# Altium PCB S52最小系统.PcbDoc (part 1 of 9)
Units mm, origin at the board's own origin, x right, y up, seen from the top; angles counter-clockwise.
Board outline 152.4 x 101.6 mm, 2 copper layers (Top Layer, Bottom Layer); 29 components, 53 nets, 176 pads, 2 vias.
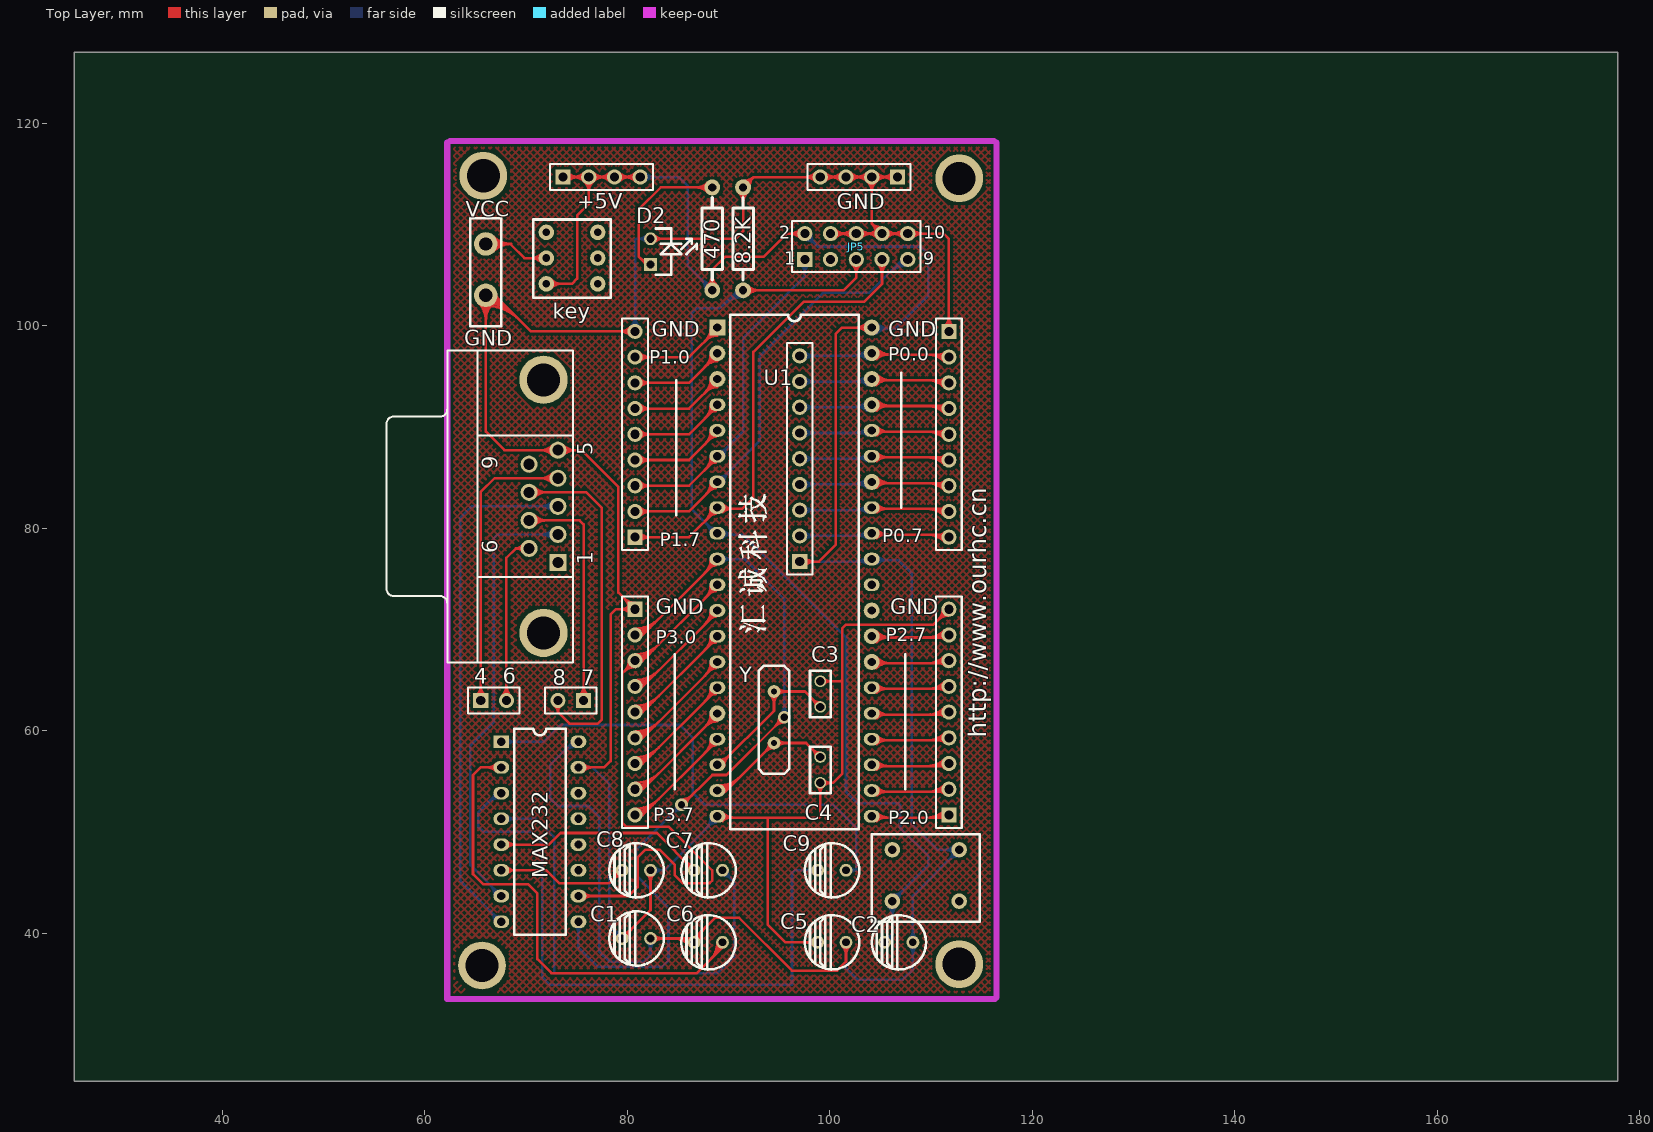
[diagram p0: Top Layer view]
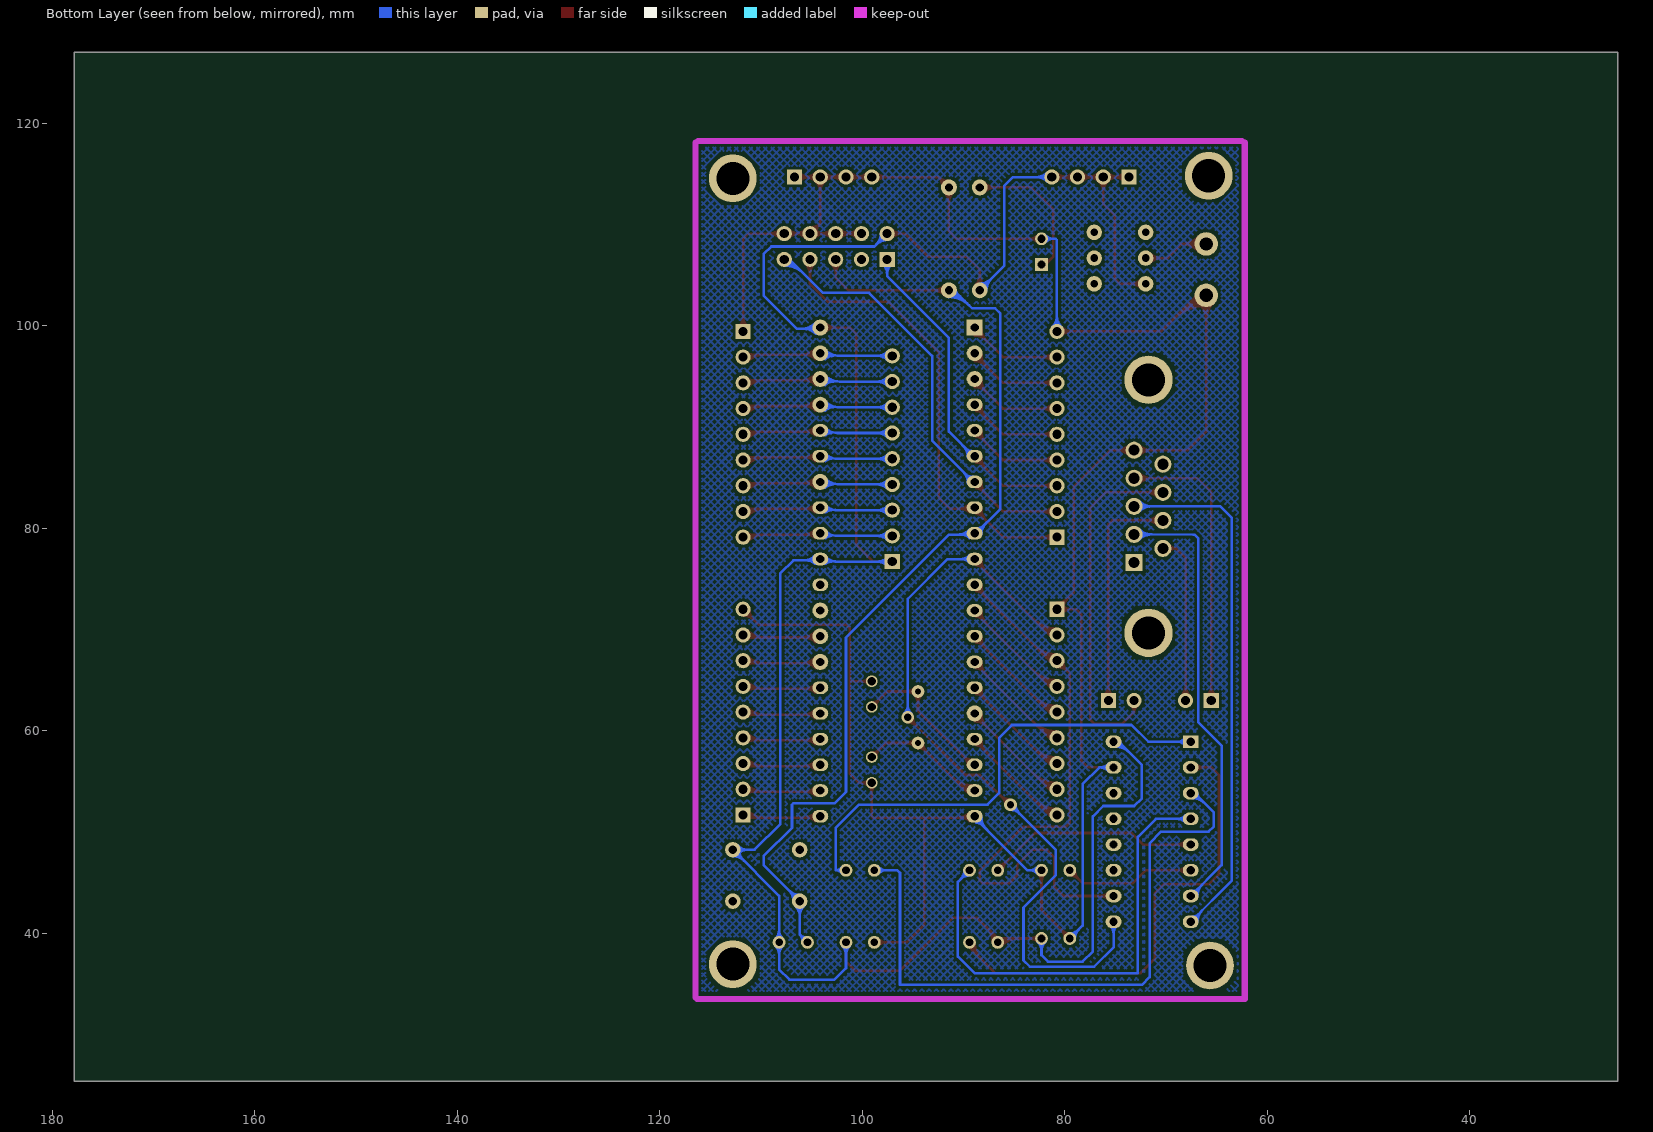
[diagram p1: Bottom Layer view, seen from below]

## Layer stack, top to bottom
Top Layer: signal copper 0.0356
Dielectric: dielectric 0.32, FR-4, Dk 4.8
Bottom Layer: signal copper 0.0356

## Board outline
25.4,25.4 177.8,25.4 177.8,127 25.4,127

## Design rules (kind name [scope] priority, off if disabled: settings)
Clearance [All] p1: gap=0.254
ComponentClearance [All] p1: gap=0.254 collisioncheckmode=0 verticalgap=0.254
PolygonConnect [All] p1: connectstyle=Relief reliefconductorwidth=0.254 reliefentries=4 polygonreliefangle="90 Angle"
RoutingVias [All] p1: holewidth=0.711 width=1.27 viastyle="Through Hole" minholewidth=0.711 minwidth=1.27 maxholewidth=0.711 maxwidth=1.27
SolderMaskExpansion [All] p1: expansion=0.102
TestPointUsage [All] p1: valid=0 allowmultiple=FALSE
Testpoint [All] p1: side=15 testpointundercomponent=TRUE minsize=1.016 maxsize=2.54 preferedsize=1.524 minholesize=0 maxholesize=1.016 preferedholesize=0.813 testpointgrid=0.025 style=1023 order=0123456789
Width [All] p1: maxlimit=0.254 minlimit=0.254 preferedwidth=0.254
17 further rules are at their usual default settings.

## Components (designator, comment, footprint, x,y, rotation, side; value= is the part's Value field where it differs from the comment)
8.2K "8.2k" AXIAL0.4 91.44,103.505 r90 top (schematic designator R23)
11 "power" power1 70.104,101.473 r90 top
470 "4.7k" AXIAL0.4 88.392,103.505 r90 top (schematic designator R2)
+5V "" HDR1X4 73.66,114.681 r0 top (schematic designator JP7)
C1 "360u\15v" cap2 86.868,39.497 r180 top
C2 "10uf" cap2 112.776,39.116 r180 top
C3 "15p" RAD0.3 99.06,61.849 r90 top
C4 "15p" RAD0.3 99.06,57.912 r270 top
C5 "1uf" cap2 106.172,39.116 r180 top
C6 "1uf" cap2 93.98,39.116 r180 top
C7 "1uf" cap2 93.98,46.228 r180 top
C8 "1uf" cap2 86.868,46.228 r180 top
C9 "1uf" cap2 106.172,46.228 r180 top
D2 "LED" LED 82.804,108.077 r270 top
GND "" HDR1X4 106.68,114.681 r180 top (schematic designator JP6)
J61 "D Connector 9" DSUB1.385-2H9 62.23,82.169 r90 top
JP1 "" HDR1X9 111.76,99.441 r270 top
JP2 "" HDR1X9 80.772,79.121 r90 top
JP3 "" HDR1X9 111.76,51.689 r90 top
JP4 "" HDR1X9 80.772,72.009 r270 top
JP5 "download" HDR2X5 97.536,106.553 r0 top
JP9 "" HDR1X2 75.692,62.992 r180 top
JP10 "Header 3" HDR1X2 65.532,62.992 r0 top
key "KEY" KEY-1 106.172,48.26 r0 top
key "Comment" key 77.724,106.68 r0 top
U1 "89c51" DIP40 88.9,100.076 r0 top
U4 "MAX232" DIP16 67.564,58.928 r0 top
Y "12M" CRYSTAL 93.472,61.341 r90 top
? "Comment" HDR1X9 97.028,76.708 r90 top

## Footprints (in the part's own frame and the unit in brackets; to place one, negate y for a bottom-side part, rotate by r counter-clockwise, add the part's x,y. Pads: shape width x height; smd on the part's side, far side on the other; paste and mask are expansions set on the pad)
AXIAL0.4 [mil]
  round 62 hole 32: 1(-0.15,-0.04) 2(399.85,-0.04)
  silkscreen extent 40,-40 360,40
cap2 [mil]
  round 50 hole 30: 1(180,0) 2(290,0)
  silkscreen extent 129,-106 340,106
CRYSTAL [mil]
  round 50 hole 25: 1(-100,-40) 2(100,-40)
  silkscreen extent -220,-100 200,20
DIP16 [mil]
  rect 62x49.21 hole 32: 1(-0.15,-0.04)
  oval 62x49.21 hole 32: 2(-0.15,-100.04) 3(-0.15,-200.04) 4(-0.15,-300.04) 5(-0.15,-400.04) 6(-0.15,-500.04) 7(-0.15,-600.04) 8(-0.15,-700.04) 9(299.85,-700.04) 10(299.85,-600.04) 11(299.85,-500.04) 12(299.85,-400.04) 13(299.85,-300.04) 14(299.85,-200.04) 15(299.85,-100.04) 16(299.85,-0.04)
  silkscreen extent 50,-750 250,50
DIP40 [mil]
  rect 62x62 hole 32: 1(-0.15,-10.04)
  round 62 hole 32: 2(-0.15,-110.04) 3(-0.15,-210.04) 16(-0.15,-1510.04) 27(599.85,-1310.04) 28(599.85,-1210.04) 29(599.85,-1110.04) 34(599.85,-610.04) 37(599.85,-310.04) 38(599.85,-210.04) 39(599.85,-110.04) 40(599.85,-10.04)
  oval 62x49.21 hole 32: 4(-0.15,-310.04) 5(-0.15,-410.04) 6(-0.15,-510.04) 7(-0.15,-610.04) 8(-0.15,-710.04) 9(-0.15,-810.04) 10(-0.15,-910.04) 11(-0.15,-1010.04) 12(-0.15,-1110.04) 13(-0.15,-1210.04) 14(-0.15,-1310.04) 15(-0.15,-1410.04) 17(-0.15,-1610.04) 18(-0.15,-1710.04) 19(-0.15,-1810.04) 20(-0.15,-1910.04) 21(599.85,-1910.04) 22(599.85,-1810.04) 23(599.85,-1710.04) 24(599.85,-1610.04) 25(599.85,-1510.04) 26(599.85,-1410.04) 30(599.85,-1010.04) 31(599.85,-910.04) 32(599.85,-810.04) 33(599.85,-710.04) 35(599.85,-510.04) 36(599.85,-410.04)
  silkscreen extent 50,-1960 550,40
DSUB1.385-2H9 [mm] "Connector; D Subminiature; 9 Position; Right Angle; Pitch 1.385 mm"
  rect 1.69x1.69 hole 1.09: 1(-5.54,-10.92)
  round 1.69 hole 1.09: 2(-2.77,-10.92) 3(0,-10.92) 4(2.77,-10.92) 5(5.54,-10.92) 6(-4.155,-8.08) 7(-1.385,-8.08) 8(1.385,-8.08) 9(4.155,-8.08)
  round 4.76 hole 3.26: 10(-12.495,-9.5) 11(12.495,-9.5)
  silkscreen extent -15.4,-12.4 15.4,6
HDR1X2 [mm] "Connector; Header; 2 Position"
  rect 1.5x1.5 hole 0.9: 1(0,0)
  round 1.5 hole 0.9: 2(2.54,0)
  silkscreen extent -1.27,-1.27 3.81,1.27
HDR1X4 [mm] "Connector; Header; 4 Position"
  rect 1.5x1.5 hole 0.9: 1(0,0)
  round 1.5 hole 0.9: 2(2.54,0) 3(5.08,0) 4(7.62,0)
  silkscreen extent -1.27,-1.27 8.89,1.27
HDR1X9 [mm] "Connector; Header; 9 Position"
  rect 1.5x1.5 hole 0.9: 1(0,0)
  round 1.5 hole 0.9: 2(2.54,0) 3(5.08,0) 4(7.62,0) 5(10.16,0) 6(12.7,0) 7(15.24,0) 8(17.78,0) 9(20.32,0)
  silkscreen extent -1.27,-1.27 21.59,1.27
HDR2X5 [mm] "Connector; Header; 5x2 Position"
  rect 1.5x1.5 hole 0.9: 1(0,0)
  round 1.5 hole 0.9: 2(0,2.54) 3(2.54,0) 4(2.54,2.54) 5(5.08,0) 6(5.08,2.54) 7(7.62,0) 8(7.62,2.54) 9(10.16,0) 10(10.16,2.54)
  silkscreen extent -1.27,-1.27 11.43,3.81
key [mil]
  round 60 hole 30: 0(-225,100) 1(-225,0) 2(-225,-100) 3(-25,-100) 4(-25,0) 5(-25,100)
  silkscreen extent -275,-155 25,150
KEY-1 [mil] "KEY"
  round 60 hole 32: 0(0,0) 1(260,0) 2(0,-200) 3(260,-200)
  silkscreen extent -80,-280 340,60
LED [mil]
  rect 50x50 hole 32: 1(80,-20)
  round 50 hole 32: 2(-20,-20)
  silkscreen extent -60,0 120,160
power1 [mm] "power"
  round 2.32 hole 1.32: 1(6.604,4.064) 2(1.524,4.064)
  silkscreen extent -1.52,2.54 9.14,5.59
RAD0.3 [mil]
  round 45 hole 32: 1(20,0) 2(120,0)
  silkscreen extent -20,-40 160,40

## Part data
8.2K 470: library part RES2
+5V GND: library part "Header 4", "Header, 4-Pin"
C1 C2 C5 C6 C7 C8 C9: library part "CAPACITOR POL", "Capacitor"
C3 C4: library part CAP, "Capacitor"
J61: "Receptacle Assembly, 9 Position, Right Angle"
JP1 JP2 JP3 JP4: library part "Header 9", "Header, 9-Pin"
JP5: library part "Header 5X2", "Header, 5-Pin, Dual row"
JP9 JP10: library part "Header 2", "Header, 2-Pin"
U1: library part 8051
Y: library part CRYSTAL, "Crystal"
?: library part "Header 9"

## Free pads (board coordinates)
  round 4.72 hole 3.267: 0(65.786,114.808) 1(112.776,114.554) 2(112.776,36.957) 3(65.659,36.83)

## Via types
v1: diameter 1.27, hole 0.711, Top Layer to Bottom Layer, 2 vias

## Nets (pads, with @x,y where several pads share a name; then routed paths per layer and width w, separated by ;. In a path a pad name is that pad's centre, name@x,y a point inside that pad or via, vN(x,y) a via of type N, cw(c..) or ccw(c..) an arc to the next point about the centre after c; other vN are vias at no path point)
4: J61.4 JP10.1 | length 111.2
  Top Layer w0.254: JP10.1@65.532,62.992 65.532,83.566 66.905,84.939 J61.4@73.15,84.939 ; JP10.1@65.091,63.433 ccw(c64.028,64.496) 65.532,64.496 ; JP10.1@65.091,63.433 ccw(c64.028,64.496) 65.532,64.496 ; JP10.1@65.091,63.433 ccw(c64.028,64.496) 65.532,64.496 ; JP10.1@65.091,63.433 ccw(c64.028,64.496) 65.532,64.496 ; JP10.1@65.091,63.433 ccw(c64.028,64.496) 65.532,64.496 ; JP10.1@65.091,63.433 ccw(c64.028,64.496) 65.532,64.496 ; JP10.1@65.091,63.433 ccw(c64.028,64.496) 65.532,64.496 ; JP10.1@65.091,63.433 ccw(c64.028,64.496) 65.532,64.496 ; JP10.1@65.091,63.433 ccw(c64.028,64.496) 65.532,64.496 ; JP10.1@65.091,63.433 ccw(c64.028,64.496) 65.532,64.496 ; JP10.1@65.271,63.253 ccw(c64.641,63.883) 65.532,63.883 ; JP10.1@65.271,63.253 ccw(c64.641,63.883) 65.532,63.883 ; JP10.1@65.271,63.253 ccw(c64.641,63.883) 65.532,63.883 ; JP10.1@65.271,63.253 ccw(c64.641,63.883) 65.532,63.883 ; JP10.1@65.271,63.253 ccw(c64.641,63.883) 65.532,63.883 ; JP10.1@65.271,63.253 ccw(c64.641,63.883) 65.532,63.883 ; JP10.1@65.271,63.253 ccw(c64.641,63.883) 65.532,63.883 ; JP10.1@65.271,63.253 ccw(c64.641,63.883) 65.532,63.883 ; JP10.1@65.271,63.253 ccw(c64.641,63.883) 65.532,63.883 ; JP10.1@65.271,63.253 ccw(c64.641,63.883) 65.532,63.883 ; 65.532,63.883 ccw(c66.423,63.883) JP10.1@65.793,63.253 ; 65.532,63.883 ccw(c66.423,63.883) JP10.1@65.793,63.253 ; 65.532,63.883 ccw(c66.423,63.883) JP10.1@65.793,63.253 ; 65.532,63.883 ccw(c66.423,63.883) JP10.1@65.793,63.253 ; 65.532,63.883 ccw(c66.423,63.883) JP10.1@65.793,63.253 ; 65.532,63.883 ccw(c66.423,63.883) JP10.1@65.793,63.253 ; 65.532,63.883 ccw(c66.423,63.883) JP10.1@65.793,63.253 ; 65.532,63.883 ccw(c66.423,63.883) JP10.1@65.793,63.253 ; 65.532,63.883 ccw(c66.423,63.883) JP10.1@65.793,63.253 ; 65.532,63.883 ccw(c66.423,63.883) JP10.1@65.793,63.253 ; 65.532,64.496 ccw(c67.036,64.496) JP10.1@65.973,63.433 ; 65.532,64.496 ccw(c67.036,64.496) JP10.1@65.973,63.433 ; 65.532,64.496 ccw(c67.036,64.496) JP10.1@65.973,63.433 ; 65.532,64.496 ccw(c67.036,64.496) JP10.1@65.973,63.433 ; 65.532,64.496 ccw(c67.036,64.496) JP10.1@65.973,63.433 ; 65.532,64.496 ccw(c67.036,64.496) JP10.1@65.973,63.433 ; 65.532,64.496 ccw(c67.036,64.496) JP10.1@65.973,63.433 ; 65.532,64.496 ccw(c67.036,64.496) JP10.1@65.973,63.433 ; 65.532,64.496 ccw(c67.036,64.496) JP10.1@65.973,63.433 ; 65.532,64.496 ccw(c67.036,64.496) JP10.1@65.973,63.433 ; 71.417,84.939 cw(c71.417,83.206) J61.4@72.642,84.431 ; 71.417,84.939 ccw(c71.417,86.672) J61.4@72.642,85.447 ; 71.417,84.939 cw(c71.417,83.206) J61.4@72.642,84.431 ; 71.417,84.939 ccw(c71.417,86.672) J61.4@72.642,85.447 ; 71.417,84.939 cw(c71.417,83.206) J61.4@72.642,84.431 ; 71.417,84.939 ccw(c71.417,86.672) J61.4@72.642,85.447 ; 71.417,84.939 ccw(c71.417,86.672) J61.4@72.642,85.447 ; 71.417,84.939 cw(c71.417,83.206) J61.4@72.642,84.431 ; 71.417,84.939 ccw(c71.417,86.672) J61.4@72.642,85.447 ; 71.417,84.939 cw(c71.417,83.206) J61.4@72.642,84.431 ; 71.417,84.939 ccw(c71.417,86.672) J61.4@72.642,85.447 ; 71.417,84.939 cw(c71.417,83.206) J61.4@72.642,84.431 ; 71.417,84.939 ccw(c71.417,86.672) J61.4@72.642,85.447 ; 71.417,84.939 cw(c71.417,83.206) J61.4@72.642,84.431 ; 71.417,84.939 ccw(c71.417,86.672) J61.4@72.642,85.447 ; 71.417,84.939 cw(c71.417,83.206) J61.4@72.642,84.431 ; 71.417,84.939 ccw(c71.417,86.672) J61.4@72.642,85.447 ; 71.417,84.939 cw(c71.417,83.206) J61.4@72.642,84.431 ; 71.417,84.939 ccw(c71.417,86.672) J61.4@72.642,85.447 ; 71.417,84.939 cw(c71.417,83.206) J61.4@72.642,84.431 ; 72.03,84.939 cw(c72.03,83.819) J61.4@72.822,84.611 ; 72.03,84.939 ccw(c72.03,86.059) J61.4@72.822,85.267 ; 72.03,84.939 cw(c72.03,83.819) J61.4@72.822,84.611 ; 72.03,84.939 ccw(c72.03,86.059) J61.4@72.822,85.267 ; 72.03,84.939 cw(c72.03,83.819) J61.4@72.822,84.611 ; 72.03,84.939 ccw(c72.03,86.059) J61.4@72.822,85.267 ; 72.03,84.939 ccw(c72.03,86.059) J61.4@72.822,85.267 ; 72.03,84.939 cw(c72.03,83.819) J61.4@72.822,84.611 ; 72.03,84.939 ccw(c72.03,86.059) J61.4@72.822,85.267 ; 72.03,84.939 cw(c72.03,83.819) J61.4@72.822,84.611 ; 72.03,84.939 ccw(c72.03,86.059) J61.4@72.822,85.267 ; 72.03,84.939 cw(c72.03,83.819) J61.4@72.822,84.611 ; 72.03,84.939 ccw(c72.03,86.059) J61.4@72.822,85.267 ; 72.03,84.939 cw(c72.03,83.819) J61.4@72.822,84.611 ; 72.03,84.939 ccw(c72.03,86.059) J61.4@72.822,85.267 ; 72.03,84.939 cw(c72.03,83.819) J61.4@72.822,84.611 ; 72.03,84.939 ccw(c72.03,86.059) J61.4@72.822,85.267 ; 72.03,84.939 cw(c72.03,83.819) J61.4@72.822,84.611 ; 72.03,84.939 ccw(c72.03,86.059) J61.4@72.822,85.267 ; 72.03,84.939 cw(c72.03,83.819) J61.4@72.822,84.611
6: J61.6 JP10.2 | length 82.1
  Top Layer w0.254: JP10.2@68.072,62.992 68.072,77.089 68.997,78.014 ; J61.6@70.31,78.014 68.997,78.014 ; JP10.2@67.631,63.433 ccw(c66.568,64.496) 68.072,64.496 ; JP10.2@67.631,63.433 ccw(c66.568,64.496) 68.072,64.496 ; JP10.2@67.631,63.433 ccw(c66.568,64.496) 68.072,64.496 ; JP10.2@67.631,63.433 ccw(c66.568,64.496) 68.072,64.496 ; JP10.2@67.631,63.433 ccw(c66.568,64.496) 68.072,64.496 ; JP10.2@67.631,63.433 ccw(c66.568,64.496) 68.072,64.496 ; JP10.2@67.631,63.433 ccw(c66.568,64.496) 68.072,64.496 ; JP10.2@67.631,63.433 ccw(c66.568,64.496) 68.072,64.496 ; JP10.2@67.631,63.433 ccw(c66.568,64.496) 68.072,64.496 ; JP10.2@67.631,63.433 ccw(c66.568,64.496) 68.072,64.496 ; JP10.2@67.811,63.253 ccw(c67.181,63.883) 68.072,63.883 ; JP10.2@67.811,63.253 ccw(c67.181,63.883) 68.072,63.883 ; JP10.2@67.811,63.253 ccw(c67.181,63.883) 68.072,63.883 ; JP10.2@67.811,63.253 ccw(c67.181,63.883) 68.072,63.883 ; JP10.2@67.811,63.253 ccw(c67.181,63.883) 68.072,63.883 ; JP10.2@67.811,63.253 ccw(c67.181,63.883) 68.072,63.883 ; JP10.2@67.811,63.253 ccw(c67.181,63.883) 68.072,63.883 ; JP10.2@67.811,63.253 ccw(c67.181,63.883) 68.072,63.883 ; JP10.2@67.811,63.253 ccw(c67.181,63.883) 68.072,63.883 ; JP10.2@67.811,63.253 ccw(c67.181,63.883) 68.072,63.883 ; 68.072,63.883 ccw(c68.963,63.883) JP10.2@68.333,63.253 ; 68.072,63.883 ccw(c68.963,63.883) JP10.2@68.333,63.253 ; 68.072,63.883 ccw(c68.963,63.883) JP10.2@68.333,63.253 ; 68.072,63.883 ccw(c68.963,63.883) JP10.2@68.333,63.253 ; 68.072,63.883 ccw(c68.963,63.883) JP10.2@68.333,63.253 ; 68.072,63.883 ccw(c68.963,63.883) JP10.2@68.333,63.253 ; 68.072,63.883 ccw(c68.963,63.883) JP10.2@68.333,63.253 ; 68.072,63.883 ccw(c68.963,63.883) JP10.2@68.333,63.253 ; 68.072,63.883 ccw(c68.963,63.883) JP10.2@68.333,63.253 ; 68.072,63.883 ccw(c68.963,63.883) JP10.2@68.333,63.253 ; 68.072,64.496 ccw(c69.576,64.496) JP10.2@68.513,63.433 ; 68.072,64.496 ccw(c69.576,64.496) JP10.2@68.513,63.433 ; 68.072,64.496 ccw(c69.576,64.496) JP10.2@68.513,63.433 ; 68.072,64.496 ccw(c69.576,64.496) JP10.2@68.513,63.433 ; 68.072,64.496 ccw(c69.576,64.496) JP10.2@68.513,63.433 ; 68.072,64.496 ccw(c69.576,64.496) JP10.2@68.513,63.433 ; 68.072,64.496 ccw(c69.576,64.496) JP10.2@68.513,63.433 ; 68.072,64.496 ccw(c69.576,64.496) JP10.2@68.513,63.433 ; 68.072,64.496 ccw(c69.576,64.496) JP10.2@68.513,63.433 ; 68.072,64.496 ccw(c69.576,64.496) JP10.2@68.513,63.433 ; 68.997,78.014 cw(c68.997,77.173) J61.6@69.705,77.627 ; 68.997,78.014 ccw(c68.997,78.855) J61.6@69.705,78.401 ; 68.997,78.014 cw(c68.997,77.173) J61.6@69.705,77.627 ; 68.997,78.014 ccw(c68.997,78.855) J61.6@69.705,78.401 ; 68.997,78.014 cw(c68.997,77.173) J61.6@69.705,77.627 ; 68.997,78.014 ccw(c68.997,78.855) J61.6@69.705,78.401 ; 68.997,78.014 ccw(c68.997,78.855) J61.6@69.705,78.401 ; 68.997,78.014 cw(c68.997,77.173) J61.6@69.705,77.627 ; 68.997,78.014 ccw(c68.997,78.855) J61.6@69.705,78.401 ; 68.997,78.014 cw(c68.997,77.173) J61.6@69.705,77.627 ; 68.997,78.014 ccw(c68.997,78.855) J61.6@69.705,78.401 ; 68.997,78.014 cw(c68.997,77.173) J61.6@69.705,77.627 ; 68.997,78.014 ccw(c68.997,78.855) J61.6@69.705,78.401 ; 68.997,78.014 cw(c68.997,77.173) J61.6@69.705,77.627 ; 68.997,78.014 ccw(c68.997,78.855) J61.6@69.705,78.401 ; 68.997,78.014 cw(c68.997,77.173) J61.6@69.705,77.627 ; 68.997,78.014 ccw(c68.997,78.855) J61.6@69.705,78.401 ; 68.997,78.014 cw(c68.997,77.173) J61.6@69.705,77.627 ; 68.997,78.014 ccw(c68.997,78.855) J61.6@69.705,78.401 ; 68.997,78.014 cw(c68.997,77.173) J61.6@69.705,77.627 ; 69.462,78.014 cw(c69.462,77.47) J61.6@69.919,77.764 ; 69.462,78.014 ccw(c69.462,78.558) J61.6@69.919,78.264 ; 69.462,78.014 cw(c69.462,77.47) J61.6@69.919,77.764 ; 69.462,78.014 ccw(c69.462,78.558) J61.6@69.919,78.264 ; 69.462,78.014 cw(c69.462,77.47) J61.6@69.919,77.764 ; 69.462,78.014 ccw(c69.462,78.558) J61.6@69.919,78.264 ; 69.462,78.014 ccw(c69.462,78.558) J61.6@69.919,78.264 ; 69.462,78.014 cw(c69.462,77.47) J61.6@69.919,77.764 ; 69.462,78.014 ccw(c69.462,78.558) J61.6@69.919,78.264 ; 69.462,78.014 cw(c69.462,77.47) J61.6@69.919,77.764 ; 69.462,78.014 ccw(c69.462,78.558) J61.6@69.919,78.264 ; 69.462,78.014 cw(c69.462,77.47) J61.6@69.919,77.764 ; 69.462,78.014 ccw(c69.462,78.558) J61.6@69.919,78.264 ; 69.462,78.014 cw(c69.462,77.47) J61.6@69.919,77.764 ; 69.462,78.014 ccw(c69.462,78.558) J61.6@69.919,78.264 ; 69.462,78.014 cw(c69.462,77.47) J61.6@69.919,77.764 ; 69.462,78.014 ccw(c69.462,78.558) J61.6@69.919,78.264 ; 69.462,78.014 cw(c69.462,77.47) J61.6@69.919,77.764 ; 69.462,78.014 ccw(c69.462,78.558) J61.6@69.919,78.264 ; 69.462,78.014 cw(c69.462,77.47) J61.6@69.919,77.764
7: J61.7 JP9.1 | length 105.4
  Top Layer w0.254: J61.7@70.31,80.784 75.299,80.784 75.692,80.391 JP9.1@75.692,62.992 ; J61.7@70.638,80.456 cw(c71.43,79.664) 71.43,80.784 ; J61.7@70.638,80.456 cw(c71.43,79.664) 71.43,80.784 ; J61.7@70.638,80.456 cw(c71.43,79.664) 71.43,80.784 ; J61.7@70.638,80.456 cw(c71.43,79.664) 71.43,80.784 ; J61.7@70.638,80.456 cw(c71.43,79.664) 71.43,80.784 ; J61.7@70.638,80.456 cw(c71.43,79.664) 71.43,80.784 ; J61.7@70.638,80.456 cw(c71.43,79.664) 71.43,80.784 ; J61.7@70.638,80.456 cw(c71.43,79.664) 71.43,80.784 ; J61.7@70.638,80.456 cw(c71.43,79.664) 71.43,80.784 ; J61.7@70.638,80.456 cw(c71.43,79.664) 71.43,80.784 ; J61.7@70.638,81.112 ccw(c71.43,81.904) 71.43,80.784 ; J61.7@70.638,81.112 ccw(c71.43,81.904) 71.43,80.784 ; J61.7@70.638,81.112 ccw(c71.43,81.904) 71.43,80.784 ; J61.7@70.638,81.112 ccw(c71.43,81.904) 71.43,80.784 ; J61.7@70.638,81.112 ccw(c71.43,81.904) 71.43,80.784 ; J61.7@70.638,81.112 ccw(c71.43,81.904) 71.43,80.784 ; J61.7@70.638,81.112 ccw(c71.43,81.904) 71.43,80.784 ; J61.7@70.638,81.112 ccw(c71.43,81.904) 71.43,80.784 ; J61.7@70.638,81.112 ccw(c71.43,81.904) 71.43,80.784 ; J61.7@70.638,81.112 ccw(c71.43,81.904) 71.43,80.784 ; J61.7@70.818,80.276 cw(c72.043,79.051) 72.043,80.784 ; J61.7@70.818,80.276 cw(c72.043,79.051) 72.043,80.784 ; J61.7@70.818,80.276 cw(c72.043,79.051) 72.043,80.784 ; J61.7@70.818,80.276 cw(c72.043,79.051) 72.043,80.784 ; J61.7@70.818,80.276 cw(c72.043,79.051) 72.043,80.784 ; J61.7@70.818,80.276 cw(c72.043,79.051) 72.043,80.784 ; J61.7@70.818,80.276 cw(c72.043,79.051) 72.043,80.784 ; J61.7@70.818,80.276 cw(c72.043,79.051) 72.043,80.784 ; J61.7@70.818,80.276 cw(c72.043,79.051) 72.043,80.784 ; J61.7@70.818,80.276 cw(c72.043,79.051) 72.043,80.784 ; J61.7@70.818,81.292 ccw(c72.043,82.517) 72.043,80.784 ; J61.7@70.818,81.292 ccw(c72.043,82.517) 72.043,80.784 ; J61.7@70.818,81.292 ccw(c72.043,82.517) 72.043,80.784 ; J61.7@70.818,81.292 ccw(c72.043,82.517) 72.043,80.784 ; J61.7@70.818,81.292 ccw(c72.043,82.517) 72.043,80.784 ; J61.7@70.818,81.292 ccw(c72.043,82.517) 72.043,80.784 ; J61.7@70.818,81.292 ccw(c72.043,82.517) 72.043,80.784 ; J61.7@70.818,81.292 ccw(c72.043,82.517) 72.043,80.784 ; J61.7@70.818,81.292 ccw(c72.043,82.517) 72.043,80.784 ; J61.7@70.818,81.292 ccw(c72.043,82.517) 72.043,80.784 ; JP9.1@75.251,63.433 ccw(c74.188,64.496) 75.692,64.496 ; JP9.1@75.251,63.433 ccw(c74.188,64.496) 75.692,64.496 ; JP9.1@75.251,63.433 ccw(c74.188,64.496) 75.692,64.496 ; JP9.1@75.251,63.433 ccw(c74.188,64.496) 75.692,64.496 ; JP9.1@75.251,63.433 ccw(c74.188,64.496) 75.692,64.496 ; JP9.1@75.251,63.433 ccw(c74.188,64.496) 75.692,64.496 ; JP9.1@75.251,63.433 ccw(c74.188,64.496) 75.692,64.496 ; JP9.1@75.251,63.433 ccw(c74.188,64.496) 75.692,64.496 ; JP9.1@75.251,63.433 ccw(c74.188,64.496) 75.692,64.496 ; JP9.1@75.251,63.433 ccw(c74.188,64.496) 75.692,64.496 ; JP9.1@75.431,63.253 ccw(c74.801,63.883) 75.692,63.883 ; JP9.1@75.431,63.253 ccw(c74.801,63.883) 75.692,63.883 ; JP9.1@75.431,63.253 ccw(c74.801,63.883) 75.692,63.883 ; JP9.1@75.431,63.253 ccw(c74.801,63.883) 75.692,63.883 ; JP9.1@75.431,63.253 ccw(c74.801,63.883) 75.692,63.883 ; JP9.1@75.431,63.253 ccw(c74.801,63.883) 75.692,63.883 ; JP9.1@75.431,63.253 ccw(c74.801,63.883) 75.692,63.883 ; JP9.1@75.431,63.253 ccw(c74.801,63.883) 75.692,63.883 ; JP9.1@75.431,63.253 ccw(c74.801,63.883) 75.692,63.883 ; JP9.1@75.431,63.253 ccw(c74.801,63.883) 75.692,63.883 ; 75.692,63.883 ccw(c76.583,63.883) JP9.1@75.953,63.253 ; 75.692,63.883 ccw(c76.583,63.883) JP9.1@75.953,63.253 ; 75.692,63.883 ccw(c76.583,63.883) JP9.1@75.953,63.253 ; 75.692,63.883 ccw(c76.583,63.883) JP9.1@75.953,63.253 ; 75.692,63.883 ccw(c76.583,63.883) JP9.1@75.953,63.253 ; 75.692,63.883 ccw(c76.583,63.883) JP9.1@75.953,63.253 ; 75.692,63.883 ccw(c76.583,63.883) JP9.1@75.953,63.253 ; 75.692,63.883 ccw(c76.583,63.883) JP9.1@75.953,63.253 ; 75.692,63.883 ccw(c76.583,63.883) JP9.1@75.953,63.253 ; 75.692,63.883 ccw(c76.583,63.883) JP9.1@75.953,63.253 ; 75.692,64.496 ccw(c77.196,64.496) JP9.1@76.133,63.433 ; 75.692,64.496 ccw(c77.196,64.496) JP9.1@76.133,63.433 ; 75.692,64.496 ccw(c77.196,64.496) JP9.1@76.133,63.433 ; 75.692,64.496 ccw(c77.196,64.496) JP9.1@76.133,63.433 ; 75.692,64.496 ccw(c77.196,64.496) JP9.1@76.133,63.433 ; 75.692,64.496 ccw(c77.196,64.496) JP9.1@76.133,63.433 ; 75.692,64.496 ccw(c77.196,64.496) JP9.1@76.133,63.433 ; 75.692,64.496 ccw(c77.196,64.496) JP9.1@76.133,63.433 ; 75.692,64.496 ccw(c77.196,64.496) JP9.1@76.133,63.433 ; 75.692,64.496 ccw(c77.196,64.496) JP9.1@76.133,63.433
8: J61.8 JP9.2 | length 94.4
  Top Layer w0.254: J61.8@70.31,83.554 75.958,83.554 77.47,82.042 77.47,61.087 77.089,60.706 74.295,60.706 73.152,61.849 ; JP9.2@73.152,62.992 73.152,61.849 ; J61.8@70.638,83.226 cw(c71.43,82.434) 71.43,83.554 ; J61.8@70.638,83.226 cw(c71.43,82.434) 71.43,83.554 ; J61.8@70.638,83.226 cw(c71.43,82.434) 71.43,83.554 ; J61.8@70.638,83.226 cw(c71.43,82.434) 71.43,83.554 ; J61.8@70.638,83.226 cw(c71.43,82.434) 71.43,83.554 ; J61.8@70.638,83.226 cw(c71.43,82.434) 71.43,83.554 ; J61.8@70.638,83.226 cw(c71.43,82.434) 71.43,83.554 ; J61.8@70.638,83.226 cw(c71.43,82.434) 71.43,83.554 ; J61.8@70.638,83.226 cw(c71.43,82.434) 71.43,83.554 ; J61.8@70.638,83.226 cw(c71.43,82.434) 71.43,83.554 ; J61.8@70.638,83.882 ccw(c71.43,84.674) 71.43,83.554 ; J61.8@70.638,83.882 ccw(c71.43,84.674) 71.43,83.554 ; J61.8@70.638,83.882 ccw(c71.43,84.674) 71.43,83.554 ; J61.8@70.638,83.882 ccw(c71.43,84.674) 71.43,83.554 ; J61.8@70.638,83.882 ccw(c71.43,84.674) 71.43,83.554 ; J61.8@70.638,83.882 ccw(c71.43,84.674) 71.43,83.554 ; J61.8@70.638,83.882 ccw(c71.43,84.674) 71.43,83.554 ; J61.8@70.638,83.882 ccw(c71.43,84.674) 71.43,83.554 ; J61.8@70.638,83.882 ccw(c71.43,84.674) 71.43,83.554 ; J61.8@70.638,83.882 ccw(c71.43,84.674) 71.43,83.554 ; J61.8@70.818,83.046 cw(c72.043,81.821) 72.043,83.554 ; J61.8@70.818,83.046 cw(c72.043,81.821) 72.043,83.554 ; J61.8@70.818,83.046 cw(c72.043,81.821) 72.043,83.554 ; J61.8@70.818,83.046 cw(c72.043,81.821) 72.043,83.554 ; J61.8@70.818,83.046 cw(c72.043,81.821) 72.043,83.554 ; J61.8@70.818,83.046 cw(c72.043,81.821) 72.043,83.554 ; J61.8@70.818,83.046 cw(c72.043,81.821) 72.043,83.554 ; J61.8@70.818,83.046 cw(c72.043,81.821) 72.043,83.554 ; J61.8@70.818,83.046 cw(c72.043,81.821) 72.043,83.554 ; J61.8@70.818,83.046 cw(c72.043,81.821) 72.043,83.554 ; J61.8@70.818,84.062 ccw(c72.043,85.287) 72.043,83.554 ; J61.8@70.818,84.062 ccw(c72.043,85.287) 72.043,83.554 ; J61.8@70.818,84.062 ccw(c72.043,85.287) 72.043,83.554 ; J61.8@70.818,84.062 ccw(c72.043,85.287) 72.043,83.554 ; J61.8@70.818,84.062 ccw(c72.043,85.287) 72.043,83.554 ; J61.8@70.818,84.062 ccw(c72.043,85.287) 72.043,83.554 ; J61.8@70.818,84.062 ccw(c72.043,85.287) 72.043,83.554 ; J61.8@70.818,84.062 ccw(c72.043,85.287) 72.043,83.554 ; J61.8@70.818,84.062 ccw(c72.043,85.287) 72.043,83.554 ; J61.8@70.818,84.062 ccw(c72.043,85.287) 72.043,83.554 ; JP9.2@72.814,62.468 cw(c72.415,61.849) 73.152,61.849 ; JP9.2@72.814,62.468 cw(c72.415,61.849) 73.152,61.849 ; JP9.2@72.814,62.468 cw(c72.415,61.849) 73.152,61.849 ; JP9.2@72.814,62.468 cw(c72.415,61.849) 73.152,61.849 ; JP9.2@72.814,62.468 cw(c72.415,61.849) 73.152,61.849 ; JP9.2@72.814,62.468 cw(c72.415,61.849) 73.152,61.849 ; JP9.2@72.814,62.468 cw(c72.415,61.849) 73.152,61.849 ; JP9.2@72.814,62.468 cw(c72.415,61.849) 73.152,61.849 ; JP9.2@72.814,62.468 cw(c72.415,61.849) 73.152,61.849 ; JP9.2@72.814,62.468 cw(c72.415,61.849) 73.152,61.849 ; 73.152,61.849 cw(c73.889,61.849) JP9.2@73.49,62.468 ; 73.152,61.849 cw(c73.889,61.849) JP9.2@73.49,62.468 ; 73.152,61.849 cw(c73.889,61.849) JP9.2@73.49,62.468 ; 73.152,61.849 cw(c73.889,61.849) JP9.2@73.49,62.468 ; 73.152,61.849 cw(c73.889,61.849) JP9.2@73.49,62.468 ; 73.152,61.849 cw(c73.889,61.849) JP9.2@73.49,62.468 ; 73.152,61.849 cw(c73.889,61.849) JP9.2@73.49,62.468 ; 73.152,61.849 cw(c73.889,61.849) JP9.2@73.49,62.468 ; 73.152,61.849 cw(c73.889,61.849) JP9.2@73.49,62.468 ; 73.152,61.849 cw(c73.889,61.849) JP9.2@73.49,62.468
GND: 8.2K.2 11.2 C1.2 C3.2 C4.2 C5.2 C8.1 D2.2 GND.1 GND.2 GND.3 GND.4 J61.5 JP1.1 JP2.9 JP3.9 JP4.1 JP5.4 JP5.6 JP5.8 JP5.10 U1.20 U4.15 | length 1660.2